# EAGLE board 102_buzzer10A (EAGLE 9.2.2)
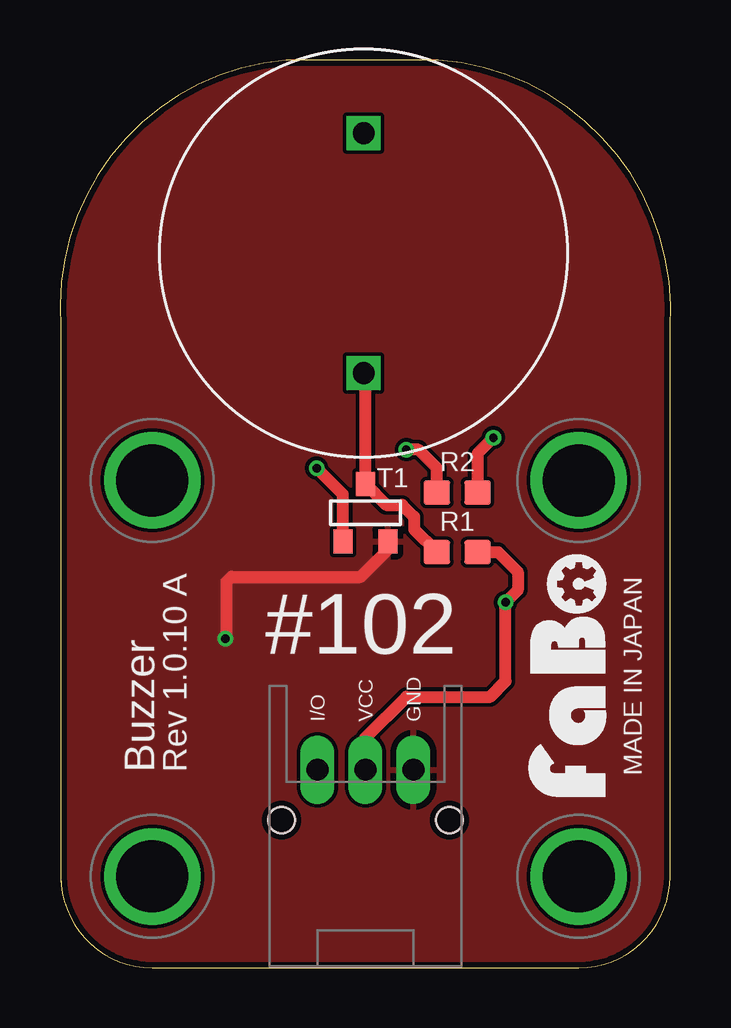
[diagram p0: board, top side]
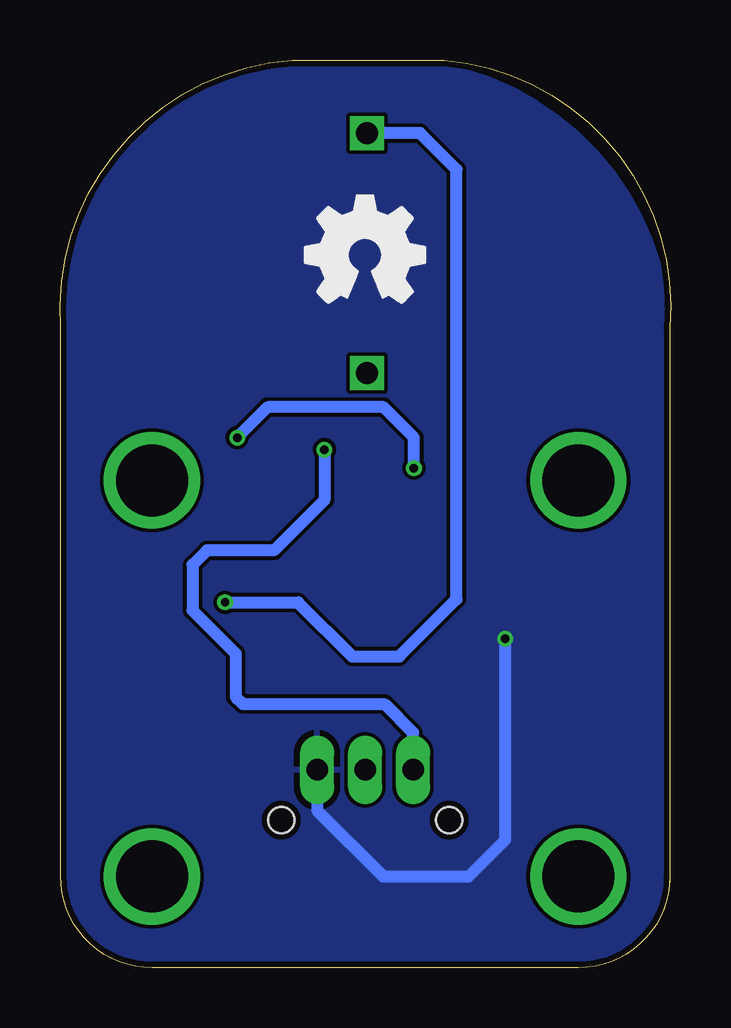
[diagram p1: board, bottom side, seen from below]

Size 25.46 x 37.85 mm. Coordinates in mm from the lower left corner, seen from the top.
Outline: 0.04,3.81 arc90 3.85,0 21.63,0 arc90 25.44,3.81 25.44,26.67 arc90 15.79,37.85 9.44,37.85 arc90 0.04,26.67 0.04,3.81
Outline: 0.04,3.81 0.04,3.56
Copper layers (1*16): Top 0.035mm / dielectric 1.5mm / Bottom 0.035mm
Design rules "SeeedStudio_2layer_DRU_no_angle_20140221": minimum track width 6mil, minimum drill 12mil, track to track 6mil, track to pad 6mil, pad to pad 6mil, via to via 6mil, smd to smd 0mil, copper to edge 10mil, drill to drill 10mil, minimum pad ring 10mil, minimum via ring 6mil, stop-mask expansion 2mil, vias tented up to drill 100mil, thermal gap 10mil

## Footprints (pad centres in the part's own frame; a part is rotated, then mirrored left to right if it is on the bottom)
FABO_BRICK_3PIN_HOLE_CON = drill 0.9 pad 1.422 long: GND 2,-8.255; I/O -2,-8.255; VCC 0,-8.255 | drill 3 pad 3.81: P$1 -8.89,3.81; P$2 8.89,3.81; P$3 -8.89,-12.7; P$4 8.89,-12.7 | hole 1.1: -3.5,-10.355; 3.5,-10.355
0603 = smd 1.1 x 1: 1 -0.85,0; 2 0.85,0
SC-59 = smd 0.787 x 0.991: 1 -0.914,1.168; 2 0.965,1.168; 3 0.025,-1.219
PS1740P02E = drill 0.9 square: P$1 0,5; P$2 0,-5

## Placement (x,y rotation side)
CON  FABO_BRICK_3PIN_INNER  [FABO_BRICK_3PIN_HOLE_CON]  12.74,16.51 0 top
R1  1K  [0603]  16.56,17.33 0 top
R2  1K  [0603]  16.56,19.82 0 top
T1  2SC3325-Y  [SC-59]  12.76,18.94 180 top
U1  PS1740P02E  [PS1740P02E]  12.66,29.79 0 top
U$2  [LOGO_FABO_MS]  23.15,12.19 90 top
U$3  [LOGO_OSHW_M_BOTTOM]  12.74,29.72 0 top

## Library data of the parts
CON = FaBo-Template 3
R1 R2 = FaBo-Resistors
T1 = FaBo-Transistor
U1 = FaBo
U$2 U$3 = FaBo-etc

## Nets
GND: CON.GND T1.1
N$1: CON.I/O R2.1
N$2: CON.VCC R1.2 U1.P$1
N$3: R1.1 T1.3 U1.P$2
N$5: R2.2 T1.2

## Tracks (layer width: path | path; a pad name or v marks a point on that pad's centre or on a via)
GND  (via drill 0.35)
  Top 0.508: v6.9,13.72 6.94,13.76 6.94,16.1 7.14,16.3 12.54,16.3 13.67,17.44 T1.1
  Bottom 0.508: CON.GND 14.74,6.57 11.98,3.81 8.42,3.81 6.9,5.33 v6.9,13.72
  pour Bottom: 4.1,0 21.63,0 arc90 25.44,3.81 25.44,4.06 25.44,26.92 arc90 14.52,37.85 12.74,37.85 11.72,37.85 arc90 0.04,26.16 0.04,4.06 arc90
  pour Top: 4.1,0 21.63,0 arc94 25.44,4.06 arc-7 25.44,26.67 arc88 16.04,37.85 arc12 9.44,37.85 arc88 0.04,26.67 arc-7 0.04,3.81 arc101
N$1  (via drill 0.35)
  Top 0.508: R2.1 15.71,20.83 14.94,21.6 v14.44,21.6
  Bottom 0.508: CON.I/O 10.74,9.8 11.94,11 17.84,11 18.14,11.3 18.14,13.1 19.94,14.9 19.94,16.8 19.34,17.4 16.54,17.4 14.44,19.5 v14.44,21.6
N$2  (via drill 0.35)
  Top 0.508: R1.2 18.27,17.33 19.09,16.51 19.09,15.75 v18.58,15.24 18.58,11.94 17.94,11.3 14.44,11.3 12.74,9.6 CON.VCC
  Bottom 0.508: v18.58,15.24 15.53,15.24 13.27,12.98 11.32,12.98 8.93,15.37 8.93,33.27 10.45,34.8 10.46,34.79 U1.P$1
N$3
  Top 0.508: U1.P$2 12.74,24.72 T1.3 13.59,19.3 14.26,19.3 14.77,18.8 14.77,18.29 15.71,17.35 R1.1
N$5  (via drill 0.35)
  Top 0.508: T1.2 11.8,19.74 v10.71,20.83 | v18.07,22.1 17.41,21.44 R2.2
  Bottom 0.508: v10.71,20.83 10.71,22.1 11.98,23.37 16.8,23.37 v18.07,22.1

## Text on the board
tNames: #102 | Buzzer | Rev 1.0.10 A | MADE IN JAPAN